# Altium PCB main.PcbDoc (part 1 of 2)
Units mm, origin at the board's own origin, x right, y up, seen from the top; angles counter-clockwise.
Board outline 75 x 37 mm, 2 copper layers (Top Layer, Bottom Layer); 95 components, 71 nets, 284 pads, 114 vias.
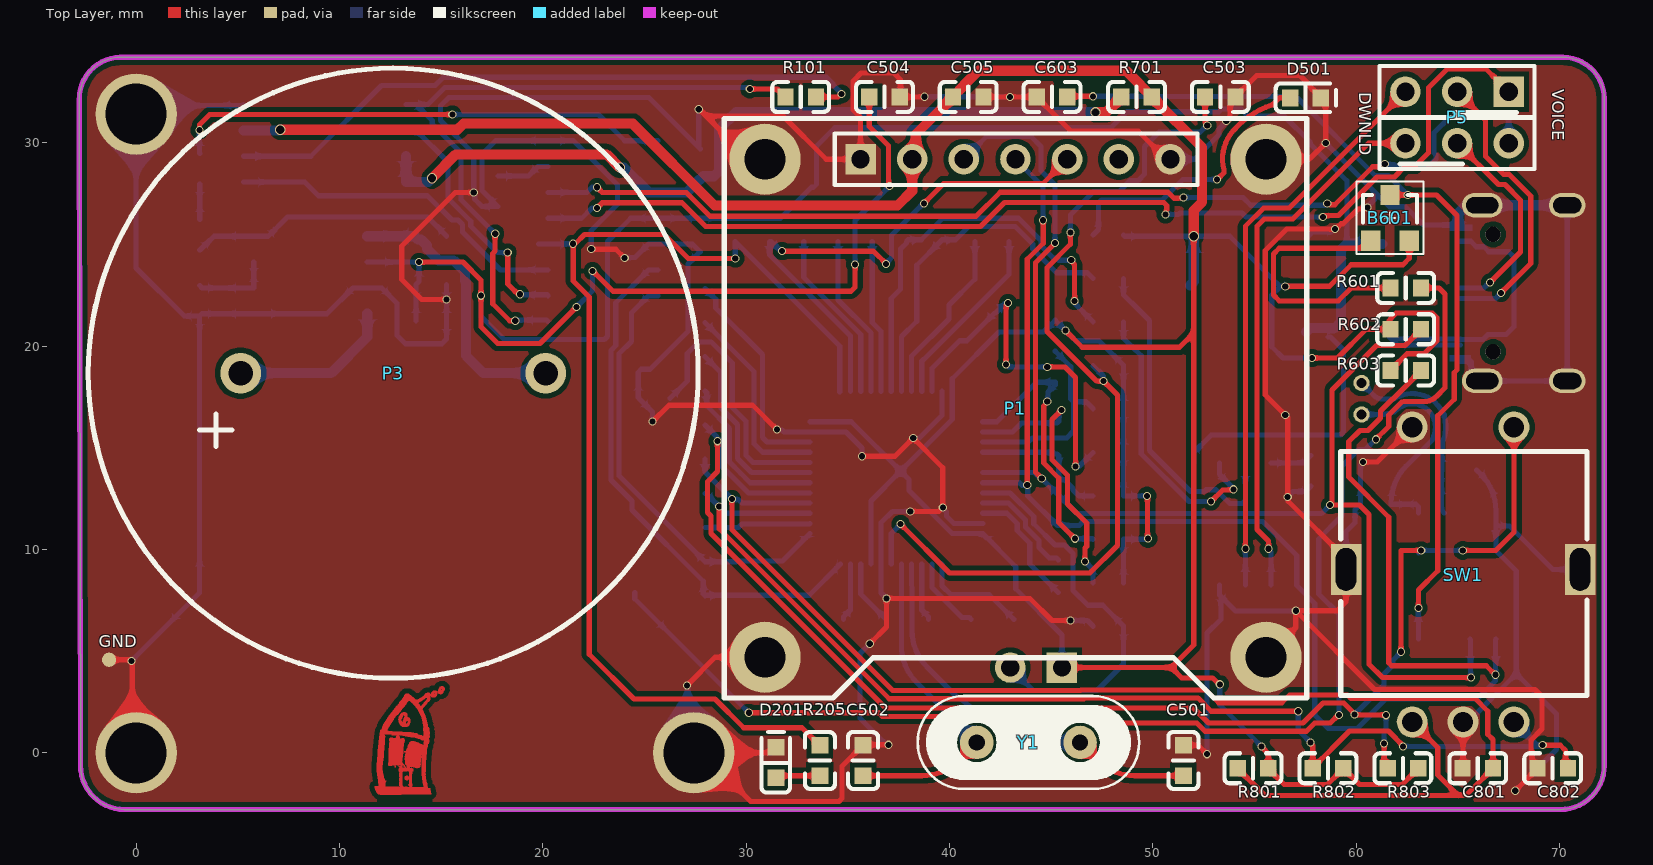
[diagram p0: Top Layer view]
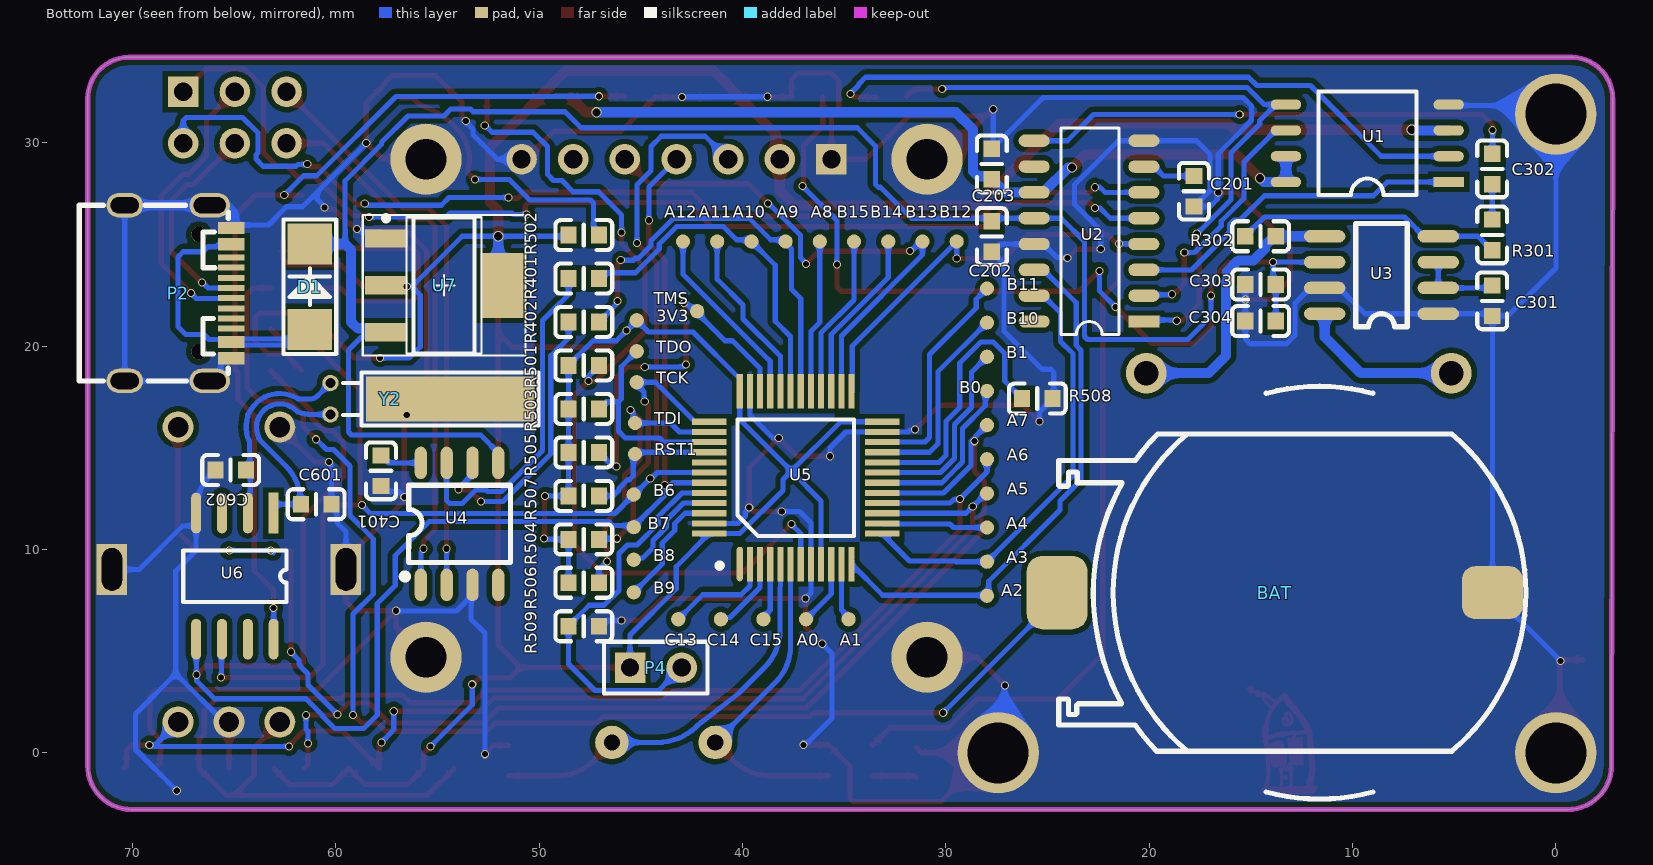
[diagram p1: Bottom Layer view, seen from below]
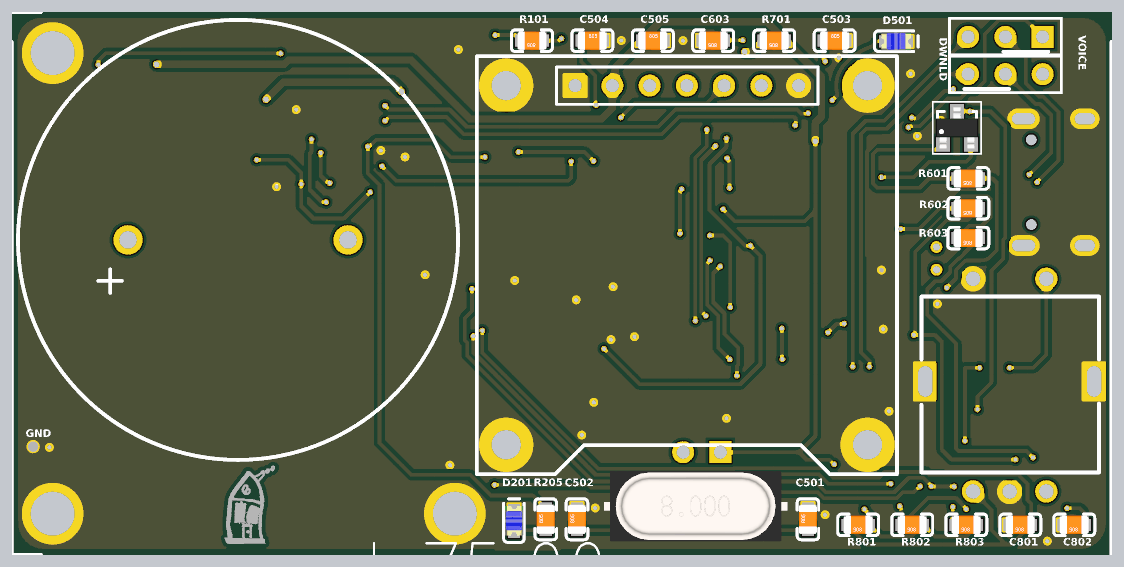
[diagram p3: 3D render of the assembled board from above, using the file's embedded part models]
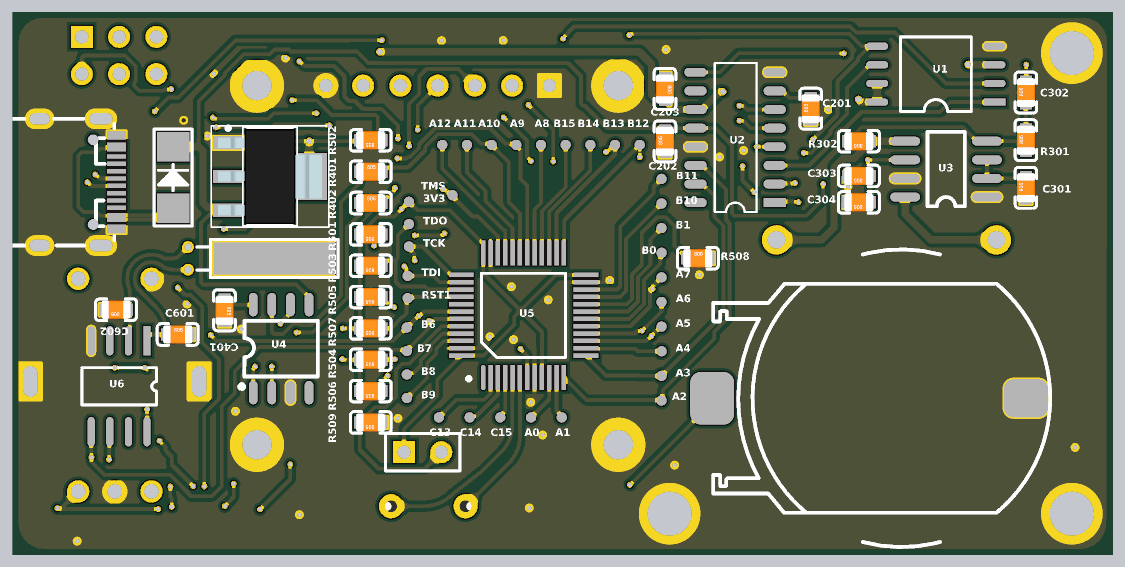
[diagram p4: 3D render of the assembled board from below, using the file's embedded part models]

## Layer stack, top to bottom
Top Solder: solder mask 0.0102, Solder Resist, Dk 3.5
Top Layer: signal copper 0.0356
Dielectric 1: dielectric 0.32, FR-4, Dk 4.8
Bottom Layer: signal copper 0.0356
Bottom Solder: solder mask 0.0102, Solder Resist, Dk 3.5

## Board outline
-2.734,-0.635 ccw(c-0.575,-0.635) -0.575,-2.794 -0.569,-2.794 70.043,-2.794 ccw(c70.043,-0.635) 72.202,-0.635 72.202,32.169 ccw(c70.17,32.169) 70.17,34.201 -0.8,34.201 -0.762,34.201 ccw(c-0.762,32.169) -2.794,32.169

## Design rules (kind name [scope] priority, off if disabled: settings)
Clearance [All] p1: gap=0.254 ignorepadtopadclearanceinfootprint=FALSE except(0: Arc-Hole Track-Hole SMDPad-Hole THPad-Hole Via-Hole Fill-Hole Poly-Hole Region-Hole Text-Hole; 0.152: Arc-Arc Arc-Track Track-Track)
DiffPairsRouting [All] p1: maxlimit=0.254 minlimit=0.254 mostfreqgap=0.254 toplayer_minwidth=0.254 toplayer_maxwidth=0.381 toplayer_prefwidth=0.381 bottomlayer_minwidth=0.254 bottomlayer_maxwidth=0.381 bottomlayer_prefwidth=0.381 maxuncoupledlength=12.7
HoleSize [All] p1: absolutevalues=TRUE maxlimit=3 minlimit=0.3 maxpercent=80.000 minpercent=20.000
MinimumSolderMaskSliver [All] p1: minsoldermaskwidth=0.152
PolygonConnect [All] p1: connectstyle=Direct reliefconductorwidth=0.254 reliefentries=4 polygonreliefangle="90 Angle" airgapwidth=0.254
RoutingVias [All] p1: holewidth=0.3 width=0.5 viastyle="Through Hole" minholewidth=0.3 minwidth=0.4 maxholewidth=1 maxwidth=1.27
SilkToSilkClearance [All] p1: silktosilkclearance=0.054
SilkToSolderMaskClearance [IsPad] p1: minsilkscreentomaskgap=0.152 clearancetoexposedcopper=TRUE
SolderMaskExpansion [All] p1: expansion=0.102 istentingtop=FALSE
Width VCC3V3 [All] p1: maxlimit=1 minlimit=0.16 preferedwidth=0.254
Width [All] p2: maxlimit=0.254 minlimit=0.254 preferedwidth=0.254
25 further rules are at their usual default settings.

## Classes and differential pairs
differential pair USB: +USB_P -USB_N

## Components (designator, comment, footprint, x,y, rotation, side; value= is the part's Value field where it differs from the comment)
3V3 "Socket" TP#1 45.201,21.269 r0 top
A0 "Socket" TP#1 36.877,6.566 r180 top
A1 "Socket" TP#1 34.784,6.566 r180 top
A2 "Socket" TP#1 27.976,7.719 r0 top
A3 "Socket" TP#1 27.976,9.398 r90 top
A4 "Socket" TP#1 27.976,11.077 r90 top
A5 "Socket" TP#1 27.976,12.757 r90 top
A6 "Socket" TP#1 27.976,14.436 r90 top
A7 "Socket" TP#1 27.976,16.115 r90 top
A8 "Socket" TP#1 36.197,25.146 r180 top
A9 "Socket" TP#1 37.88,25.146 r180 top
A10 "Socket" TP#1 39.563,25.146 r270 top
A11 "Socket" TP#1 41.246,25.146 r270 top
A12 "Socket" TP#1 42.928,25.146 r270 top
B0 "Socket" TP#1 27.976,17.794 r90 top
B1 "Socket" TP#1 27.976,19.474 r90 top
B6 "Socket" TP#1 45.347,12.699 r90 top
B7 "Socket" TP#1 45.347,11.096 r0 top
B8 "Socket" TP#1 45.347,9.492 r90 top
B9 "Socket" TP#1 45.347,7.889 r90 top
B10 "Socket" TP#1 27.976,21.153 r180 top
B11 "Socket" TP#1 27.976,22.832 r180 top
B12 "Socket" TP#1 29.466,25.146 r270 top
B13 "Socket" TP#1 31.149,25.146 r270 top
B14 "Socket" TP#1 32.832,25.146 r270 top
B15 "Socket" TP#1 34.515,25.146 r270 top
B601 "BAS70-05" SMT_TRIODE_NPN 61.661,26.307 r0 top
BAT "3.6V CR2032-8" CR2032-8 11.623,7.874 r270 bottom locked
C13 "Socket" TP#1 43.157,6.566 r270 top
C14 "Socket" TP#1 41.064,6.566 r270 top
C15 "Socket" TP#1 38.97,6.566 r270 top
C201 "105" 0603_CAP 17.803,27.615 r90 bottom
C202 "105" 0603_CAP 27.74,25.392 r90 bottom
C203 "105" 0603_CAP 27.74,28.959 r270 bottom
C301 "105" 0603_CAP 3.131,22.225 r90 bottom
C302 "105" 0603_CAP 3.131,28.715 r90 bottom
C303 "104" 0603_CAP 14.52,23.03 r0 bottom
C304 "475" 0603_CAP 14.52,21.231 r0 bottom
C401 "100pF" 0603_CAP 57.78,13.867 r270 bottom
C501 "22pF" 0603_CAP 51.501,-0.381 r90 top
C502 "22pF" 0603_CAP 35.753,-0.381 r90 top
C503 "104" 0603_CAP 53.318,32.258 r0 top
C504 "10uF" 0603_CAP 36.801,32.258 r0 top
C505 "10uF" 0603_CAP 40.921,32.258 r0 top
C601 "15pF" 0603_CAP 60.966,12.221 r180 bottom
C602 "15pF" 0603_CAP 65.172,13.909 r0 bottom
C603 "104" 0603_CAP 45.04,32.258 r180 top
C801 "104" 0603_CAP 65.979,-0.762 r180 top
C802 "104" 0603_CAP 69.662,-0.762 r180 top
D1 "1N5819/SS14" SMA 61.28,20.819 r90 bottom
D201 "LED-r" LED-0603 31.468,-0.483 r90 top
D501 "LED-r" LED-0603 57.514,32.207 r0 top
GND "Socket" TP#2 -1.331,4.572 r90 top
P1 "I2C screen" Screen 28.925,31.189 r0 top locked
P2 "TypeC-16P" "type-c 16pin" 67.757,22.606 r270 bottom locked
P3 "SPEAKER" Speaker 12.639,18.669 r0 top locked
P4 "NC" HDR1X2 45.532,4.191 r180 bottom
P5 "NC 3X2" HDR2X3 67.503,32.512 r180 top locked
R101 "100" 0603_CAP 32.682,32.258 r180 top
R205 "330" 0603_CAP 33.623,-0.381 r90 top
R301 "20K" 0603_CAP 3.131,25.47 r90 bottom
R302 "47K" 0603_CAP 14.52,25.4 r0 bottom
R401 "0" 0603_CAP 47.805,23.322 r180 bottom
R402 "0" 0603_CAP 47.805,21.184 r180 bottom
R501 "10K" 0603_CAP 47.805,19.047 r0 bottom
R502 "220" 0603_CAP 47.805,25.459 r0 bottom
R503 "10K" 0603_CAP 47.805,16.91 r0 bottom
R504 "10K" 0603_CAP 47.805,10.498 r0 bottom
R505 "10K" 0603_CAP 47.805,14.772 r0 bottom
R506 "10K" 0603_CAP 47.805,8.36 r0 bottom
R507 "10K" 0603_CAP 47.805,12.635 r0 bottom
R508 "100K" 0603_CAP 25.503,17.416 r180 bottom
R509 "10K" 0603_CAP 47.805,6.223 r0 bottom
R601 "1K" 0603_CAP 62.435,22.86 r180 top
R602 "4.7K" 0603_CAP 62.435,20.828 r180 top
R603 "4.7K" 0603_CAP 62.435,18.796 r180 top
R701 "0 NC" 0603_CAP 49.199,32.258 r180 top
R801 "10K" 0603_CAP 54.93,-0.762 r180 top
R802 "10K" 0603_CAP 58.613,-0.762 r180 top
R803 "10K" 0603_CAP 62.296,-0.762 r180 top
RST1 "Socket" TP#1 45.288,14.693 r90 top
SW1 "EC11" EC11 65.257,1.517 r0 top locked
TCK "Socket" TP#1 45.201,18.221 r90 top
TDI "Socket" TP#1 45.288,16.217 r90 top
TDO "Socket" TP#1 45.201,19.745 r90 top
TMS "Socket" TP#1 42.23,21.717 r180 top
U1 "W25Q32" SOP8-208mil 5.273,28.067 r0 bottom
U2 "JQ8400-FL" JQF8400-FL 20.259,21.209 r0 bottom locked
U3 "8002A" 8002A 5.781,21.59 r0 bottom
U4 "CH340N" SOP8 55.819,8.255 r180 bottom locked
U5 "STM32F103C8T6" LQFP48 40.134,9.28 r180 bottom locked
U6 "PCF8563T/5" PCF8563 63.058,11.788 r270 bottom locked
U7 "AMS1117-3.3" SOT-223 54.676,22.987 r0 bottom locked
Y1 "8MHz" CPU-crystal 41.341,0.508 r0 top locked
Y2 "32.768K" Crystal 60.264,16.637 r90 bottom locked

## Footprints (in the part's own frame and the unit in brackets; to place one, negate y for a bottom-side part, rotate by r counter-clockwise, add the part's x,y. Pads: shape width x height; smd on the part's side, far side on the other; paste and mask are expansions set on the pad)
0603_CAP [mm]
  rect 0.8x0.83 smd: 1(-0.75,0) 2(0.75,0)
  silkscreen extent -1.4,-0.74 1.4,0.74, body extent -1,-0.62 1,0.63, height 0.78
8002A [mil]
  oval 80x24 smd: 1(0,0) 2(0,-50) 3(0,-100) 4(0,-150) 5(220,-150) 6(220,-100) 7(220,-50) 8(220,0)
  silkscreen extent 60,-175 160,25
CPU-crystal [mil] "8MHz"
  round 65 hole 31.5: 1(0,0) 2(200,0)
  silkscreen extent -114,-90 314,90, body extent -148,-94 344,94, height 157
CR2032-8 [mm] "东莞市科宇塑胶五金有限公司"
  rrect50% 3.6x3 smd: 1(0,-12.9)
  rrect50% 2.6x3 smd: 2(0,8.5)
  silkscreen extent -10.15,-12.83 10.15,10.15
Crystal [mm] "32.768KHz"
  round 0.8 hole 0.5: 1(0,0) 2(1.549,0)
  rect 2.2x8.3 smd: 3(0.762,-5.893)
  silkscreen extent -0.54,-10.24 2.06,-0.61
EC11 [mm]
  round 1.524 hole 1: 1(-2.5,0) 2(0,0) 3(2.5,0) 4(2.5,14.5) 5(-2.5,14.5)
  rect 1.5x2.524 hole 1 slot 2.1 at 90 deg: 6(5.755,7.5) 7(-5.755,7.5)
  silkscreen extent -6.02,1.3 6.09,13.3
HDR1X2 [mm] "Connector; Header; 2 Position"
  rect 1.5x1.5 hole 0.9: 1(0,0)
  round 1.5 hole 0.9: 2(2.54,0)
  silkscreen extent -1.27,-1.27 3.81,1.27
HDR2X3 [mm] "Connector; Header; 3x2 Position"
  rect 1.5x1.5 hole 0.9: 1(0,0)
  round 1.5 hole 0.9: 2(0,2.54) 3(2.54,0) 4(2.54,2.54) 5(5.08,0) 6(5.08,2.54)
  silkscreen extent -1.27,-1.27 6.35,3.81
JQF8400-FL [mil]
  rect 60x24 smd: 1(0,0)
  oval 60x24 smd: 2(0,-50) 3(0,-100) 4(0,-150) 5(0,-200) 6(0,-250) 7(0,-300) 8(0,-350) 9(212.6,-350) 10(212.6,-300) 11(212.6,-250) 12(212.6,-200) 13(212.6,-150) 14(212.6,-100) 15(212.6,-50) 16(212.6,0)
  silkscreen extent 49,-375 161,25
LED-0603 [mm]
  rect 0.821x0.83 smd: 1(-0.75,0) 2(0.75,0)
  silkscreen extent -1.47,-0.69 1.5,0.71, body extent -1.01,-0.62 1.01,0.63, height 1.1
LQFP48 [mm]
  oval 0.3x1.7 smd: 1(0,0)
  rect 0.3x1.7 smd: 2(0.5,0) 3(1,0) 4(1.5,0) 5(2,0) 6(2.5,0) 7(3,0) 8(3.5,0) 9(4,0) 10(4.5,0) 11(5,0) 12(5.5,0) 25(5.5,8.5) 26(5,8.5) 27(4.5,8.5) 28(4,8.5) 29(3.5,8.5) 30(3,8.5) 31(2.5,8.5) 32(2,8.5) 33(1.5,8.5) 34(1,8.5) 35(0.5,8.5) 36(0,8.5)
  rect 1.7x0.3 smd: 13(7,1.5) 14(7,2) 15(7,2.5) 16(7,3) 17(7,3.5) 18(7,4) 19(7,4.5) 20(7,5) 21(7,5.5) 22(7,6) 23(7,6.5) 24(7,7) 37(-1.5,7) 38(-1.5,6.5) 39(-1.5,6) 40(-1.5,5.5) 41(-1.5,5) 42(-1.5,4.5) 43(-1.5,4) 44(-1.5,3.5) 45(-1.5,3) 46(-1.5,2.5) 47(-1.5,2) 48(-1.5,1.5)
  silkscreen extent -1.12,-0.2 5.61,7.11
PCF8563 [mm]
  rect 2x0.49 smd: 1(0,0)
  oval 2x0.49 smd: 2(0,-1.27) 3(0,-2.54) 4(0,-3.81) 5(6.2,-3.81) 6(6.2,-2.54) 7(6.2,-1.27) 8(6.2,0)
  silkscreen extent 1.84,-4.45 4.37,0.63
Screen [mm] "0.96 inch"
  rect 1.5x1.5 hole 0.9: 1(6.7,-2)
  round 1.5 hole 0.9: 2(9.24,-2) 3(11.78,-2) 4(14.32,-2) 5(16.86,-2) 6(19.4,-2) 7(21.94,-2)
  round 3.5 hole 2: ""(2,-26.49) ""(2,-2) ""(26.64,-26.49) ""(26.64,-2)
  silkscreen extent 0,-28.49 28.64,0
SMA [mm]
  rect 2x2.2 smd: 1(0,0) 2(4.2,0)
  silkscreen extent -1.2,-1.3 5.4,1.3
SMT_TRIODE_NPN [mm] "Surface mount NPN transistor, package SOT-23"
  rect 0.95x1 smd: 1(-0.95,-1.125) 2(0.95,-1.125) 3(0,1.125)
  silkscreen extent -1.65,-1.78 1.65,1.78, body extent -1.45,-1.4 1.45,1.4, height 1.3
SOP8 [mm] "CH340N"
  oval 0.6x1.598 smd: 1(0,0) 2(1.27,0) 3(2.54,0) 4(3.81,0) 5(3.81,6) 6(2.54,6) 7(1.27,6) 8(0,6)
  silkscreen extent -0.94,0.26 4.4,4.9
SOP8-208mil [mm]
  rect 1.5x0.5 smd: 1(0,0)
  oval 1.5x0.5 smd: 2(0,-1.27) 3(0,-2.54) 4(0,-3.81) 5(8,-3.81) 6(8,-2.54) 7(8,-1.27) 8(8,0)
  silkscreen extent 1.58,-4.44 6.4,0.64
SOT-223 [mm] "3 LEAD SOT-223 PLASTIC PACKAGE"
  rect 2.1x0.9 smd: 1(2.85,-2.3) 2(2.85,0) 3(2.85,2.3)
  rect 2.1x3.2 smd: 2(-2.85,0)
  silkscreen extent -4,-3.45 4,3.45, body extent -3.54,-3.25 3.54,3.25, height 1.65
Speaker [mm]
  round 2 hole 1.2: 1(-7.5,0) 2(7.5,0)
  silkscreen extent -15,-15 15,15
TP#1 [mm]
  round 0.7 smd far side: 1(0,0)
TP#2 [mm]
  round 0.7 smd: 1(0,0)
"type-c 16pin" [mm] "https://detail.1688.com/offer/564875961516.html?spm=a26352.13672862.offerlist.11.52bd1e62PUNFDG"
  rect 0.3x1.3 smd: A1(-3.35,2.623) A4(-2.55,2.623) A5(-1.25,2.623) A6(-0.25,2.623) A7(0.25,2.623) A8(1.25,2.624) A9(2.55,2.623) A12(3.35,2.623) B1(3.05,2.623) B4(2.25,2.623) B5(1.75,2.623) B6(0.75,2.623) B7(-0.75,2.623) B8(-1.75,2.624) B9(-2.25,2.623) B12(-3.05,2.623)
  oval 1.2x1.8 hole 0.8 slot 1.4 at 90 deg: S1(-4.32,-2.624) S1(4.32,-2.624)
  oval 1.2x2 hole 0.8 slot 1.6 at 90 deg: S1(-4.32,1.556) S1(4.32,1.556)
  round 0.75 hole 0.75 unplated: ""(-2.89,1.026) ""(2.89,1.026)
  silkscreen extent -4.32,-4.86 4.32,2.47

## Part data
B601: library part "BAS70 74", "贴片三极管  丝印75"
BAT: library part Battery, "电池座 半圆形", LatestRevisionDate=17-Jul-2002, LatestRevisionNote="Re-released for DXP Platform.", PackageReference=BAT-2, Published=24-Mar-1999, Publisher="Altium Limited"
C201 C202 C203 C301 C302 C303 C304 C401 C501 C502 C503 C504 C505 C601 C602 C603 C801 C802: library part Cap, "Capacitor 0603", LatestRevisionDate=17-Jul-2002, LatestRevisionNote="Re-released for DXP Platform.", PackageReference=RAD-0.3, Published=8-Jun-2000, Publisher="Altium Limited"
  C201 C202 C203 C301 C302 C303 C304 C401: PackageDescription="Radial Cap, Thru-Hole; 2 Leads; 0.3 in Pin Spacing"
D1: library part SMT_DIODE_SCHOTTKY_SOD_323, "肖特基整流二极管SOD-323"
D201 D501: library part LED2, "NC", LatestRevisionDate=17-Jul-2002, LatestRevisionNote="Re-released for DXP Platform.", PackageReference=3.2X1.6X1.1, PackageVersion=Feb-2002, Published=8-Jun-2000, Publisher="Altium Limited"
P1: library part "Header 7", "单排 2.54母座7P", LatestRevisionDate=17-Jul-2002, LatestRevisionNote="Re-released for DXP Platform.", Publisher="Altium Limited"
P2: "TypeC接口16P"
P3: library part "Header 2", "扬声器", LatestRevisionDate=17-Jul-2002, LatestRevisionNote="Re-released for DXP Platform.", Publisher="Altium Limited"
P4: library part "Header 2", "下载短接口", LatestRevisionDate=17-Jul-2002, LatestRevisionNote="Re-released for DXP Platform.", Publisher="Altium Limited"
P5: library part "Header 3X2", "USB跳线接口", LatestRevisionDate=17-Jul-2002, LatestRevisionNote="Re-released for DXP Platform.", Publisher="Altium Limited"
R101 R205 R301 R302 R401 R402 R501 R502 R503 R504 R505 R506 R507 R508 R509 R601 R602 R603 R701 R801 R802 R803: library part Res2, "Resistor 0603", LatestRevisionDate=17-Jul-2002, LatestRevisionNote="Re-released for DXP Platform.", PackageReference=AXIAL-0.4, Published=8-Jun-2000, Publisher="Altium Limited"
  R101 R205 R301 R302 R401 R402 R801 R802 R803: PackageDescription="Axial Device, Thru-Hole; 2 Leads; 0.4 in Pin Spacing"
SW1: "旋转编码器20脉冲"
U1: "Flash"
U2: "语音芯片"
U3: "3W功放"
U4: library part ch340, "U转串"
U5: library part STM32F101CB, "单片机"
U6: library part PCF8563, "时钟芯片"
U7: library part NCP1117
Y1: library part XTAL, "49S型直插无源晶振", LatestRevisionDate=17-Jul-2002, LatestRevisionNote="Re-released for DXP Platform.", PackageReference=R38, Published=8-Jun-2000, Publisher="Altium Limited"
Y2: library part XTAL, "圆柱型3*8mm无源晶振", LatestRevisionDate=17-Jul-2002, LatestRevisionNote="Re-released for DXP Platform.", PackageReference=R38, Published=8-Jun-2000, Publisher="Altium Limited"
3V3 A0 A1 A2 A3 A4 A5 A6 A7 A8 A9 A10 A11 A12 B0 B1 B6 B7 B8 B9 B10 B11 B12 B13 B14 B15 C13 C14 C15 GND RST1 TCK TDI TDO TMS: LatestRevisionDate=17-Jul-2002, LatestRevisionNote="Re-released for DXP Platform.", Publisher="Altium Limited"

## Free pads (board coordinates)
  round 4 hole 3: ""(0,0) ""(0,31.407) ""(27.426,0)

## Via types
v1: diameter 0.4, hole 0.3, Top Layer to Bottom Layer, 109 vias
v2: diameter 0.5, hole 0.4, Top Layer to Bottom Layer, 5 vias

## Nets (pads, with @x,y where several pads share a name; then routed paths per layer and width w, separated by ;. In a path a pad name is that pad's centre, name@x,y a point inside that pad or via, vN(x,y) a via of type N, cw(c..) or ccw(c..) an arc to the next point about the centre after c; other vN are vias at no path point)
3.3V: C203.2 R701.2 U1.7 U1.8 U2.11 | length 41
  Top Layer w0.5: v2(14.548,28.252) 15.724,29.428 23.137,29.428 v2(23.788,28.777) ; v2(47.183,31.496) 47.702,31.496 48.449,32.243 R701.2@48.449,32.258
  Bottom Layer w0.5: U1.7@13.273,29.337 U1.8@13.273,28.067 14.363,28.067 v2(14.548,28.252) ; v2(23.788,28.777) 23.984,28.777 25.202,27.559 27.09,27.559 27.574,28.044 27.574,28.059 27.725,28.209 C203.2@27.74,28.209 27.882,28.351 28.417,28.351 28.667,28.601 28.667,30.658 29.505,31.496 v2(47.183,31.496)
BUSY: B12.1 R205.2 U2.4 U5.25 | length 54.4
  Top Layer w0.254: v1(29.465,24.311) 27.154,24.311 25.973,25.492 22.05,25.492 21.59,25.032 v1(21.493,25.032) 21.493,23.204 22.284,22.413 22.284,4.843 24.477,2.649 28.467,2.649 29.882,1.235 32.743,1.235 33.608,0.369 R205.2@33.623,0.369
  Bottom Layer w0.254: U2.4@19.802,25.019 U2.4@20.259,25.019 20.265,25.025 21.487,25.025 v1(21.493,25.032) ; v1@29.466,24.312 B12.1@29.466,25.146 ; B12.1@29.466,25.146 30.474,24.139 34.603,20.01 U5.25@34.603,17.749
CS: A4.1 U5.14 | length 5.2
  Bottom Layer w0.254: A4.1@27.976,11.077 29.623,11.077 29.794,11.249 33.103,11.249 U5.14@33.134,11.28
DACL: C302.2 U2.9 | length 24.7
  Top Layer w0.254: v1(3.11,30.618) 3.124,30.632 3.124,30.891 3.621,31.388 v1(15.549,31.388)
  Bottom Layer w0.254: v1(3.11,30.618) 3.11,29.486 C302.2@3.131,29.465 ; v1(15.549,31.388) 22.738,31.388 24.027,30.099 U2.9@25.659,30.099
DACR: U2.10
EC11_A: A6.1 C801.1 R801.2 SW1.1 U5.16 | length 70.3
  Top Layer w0.254: v1(29.297,12.481) 29.297,10.97 37.207,3.06 46.44,3.06 46.475,3.095 52.6,3.095 53.238,2.457 56.337,2.457 56.728,2.849 59.558,2.849 59.74,2.667 65.851,2.667 66.474,2.044 66.474,0.913 66.729,0.657 C801.1@66.729,-0.762 ; R801.2@54.18,-0.762 54.18,-0.777 55.51,-2.107 65.018,-2.107 ; SW1.1@62.757,1.517 64.009,0.265 64.009,-1.098 65.018,-2.107 ; C801.1@66.729,-0.777 66.456,-1.05 66.441,-1.05 65.384,-2.107 65.018,-2.107
  Bottom Layer w0.254: A6.1@27.976,14.436 27.976,13.802 v1(29.297,12.481) 29.325,12.453 29.615,12.453 29.789,12.28 U5.16@33.134,12.28
EC11_B: A5.1 C802.1 R802.2 SW1.3 U5.15 | length 58.3
  Top Layer w0.254: v1(28.674,12.11) 28.674,11.019 37.039,2.654 46.608,2.654 46.643,2.688 52.229,2.688 52.874,2.043 v1(57.151,2.043) ; v1(57.756,0.509) 57.756,0.47 57.863,0.363 R802.2@57.863,-0.747 ; R802.2@57.863,-0.762 R802.2@57.863,-0.747 ; v1(62.295,0.315) 62.295,0.355 61.957,0.693 61.957,0.701 61.594,1.064 59.674,1.064 R802.2@57.863,-0.747 ; v1(69.172,0.374) 70.034,0.374 70.297,0.111 70.297,-0.647 C802.1@70.412,-0.762
  Bottom Layer w0.254: A5.1@27.976,12.757 28.032,12.757 29.009,11.78 U5.15@33.134,11.78 ; v1(57.151,2.043) 57.151,1.154 57.275,1.03 57.275,0.99 v1(57.756,0.509) ; v1(62.295,0.315) v1@69.01,0.315 ; SW1.3@67.757,1.517 68.872,0.402 69.144,0.402 v1(69.172,0.374)
EC11_Key: A7.1 R803.2 SW1.4 U5.17 | length 72.9
  Top Layer w0.254: v1(28.593,15.323) 28.593,13.827 28.093,13.326 28.093,11.816 28.268,11.641 28.268,10.78 36.85,2.198 52.002,2.198 52.738,1.462 57.391,1.462 58.371,2.442 59.39,2.442 59.73,2.102 59.73,2.1 59.914,1.916 v1(59.914,1.877) 59.929,1.862 61.455,1.862 v1(61.469,1.848) ; v1(61.376,0.46) 61.376,-0.592 R803.2@61.546,-0.762 ; v1(62.204,4.97) 62.204,9.935 62.222,9.953 v1(63.197,9.953) ; v1(65.242,9.954) v1(65.242,9.954) 66.868,9.953 67.757,10.842 SW1.4@67.757,16.017
  Bottom Layer w0.254: A7.1@27.976,16.115 28.565,15.526 28.565,15.351 v1(28.593,15.323) ; v1@28.681,15.41 28.768,15.323 28.768,14.13 30.118,12.78 U5.17@33.134,12.78 ; v1(59.914,1.877) 61.373,3.335 61.373,3.88 61.732,4.239 61.732,4.297 61.804,4.369 61.804,4.548 62.204,4.948 v1(62.204,4.97) ; v1(61.376,0.46) 61.376,1.075 61.469,1.168 v1(61.469,1.848) ; v1@63.072,9.828 v1(63.197,9.953) v1(63.197,9.953) v1(65.242,9.954)
GND: BAT.2 C201.1 C202.1 C203.1 C301.1 C303.2 C304.2 C401.2 C501.2 C502.2 C503.2 C504.2 C505.2 C601.2 C602.2 C603.2 C801.2 C802.2 D201.2 D501.2 GND.1 P1. P1.1 P1.7 P2.A1 P2.A12 P2.B1 P2.B12 P2.S1 pad. R508.2 R509.1 SW1.2 SW1.5 SW1.6 SW1.7 U1.4 U2.8 U2.13 U3.1 U3.7 U4.3 U5.8 U5.23 U5.35 U5.47 U6.4 U7.1 Y2.3 | length 381.9
  Top Layer w0.254: GND.1@-1.331,4.572 -0.312,4.572 -0.262,4.522 v1(-0.222,4.522) -0.194,4.494 -0.194,0.194 pad.@0,0 ; v1(15.27,22.293) 14.046,22.293 13.064,23.275 13.064,24.925 15.691,27.552 v1(16.604,27.552) ; v1(22.381,24.766) 23.585,24.766 v1(24.026,24.325) ; v1(25.398,16.289) 26.203,17.094 30.319,17.094 v1(31.509,15.904) ; v1(27.085,3.311) 28.473,4.699 P1.@30.925,4.699 ; pad.@27.426,0 pad.@27.838,0 ; v1(27.666,31.647) 27.706,31.647 28.032,31.32 ; P1.@30.925,29.189 30.163,29.189 28.032,31.32 ; D201.2@31.468,0.267 31.201,0 pad.@27.838,0 ; v1(35.702,14.581) 37.319,14.581 v1(38.215,15.477) 39.671,14.021 v1(39.671,12.068) 39.475,11.872 v1(38.071,11.872) ; v1(36.08,5.362) 36.899,6.181 v1(36.899,7.595) 43.948,7.595 45.04,6.503 v1(45.95,6.503) ; v1(36.997,0.392) 35.776,0.392 C502.2@35.753,0.369 35.738,0.369 34.708,-0.661 34.708,-2.241 34.559,-2.39 30.228,-2.39 pad.@27.838,0 ; v1(38.775,32.263) 38.77,32.258 C504.2@37.551,32.258 37.591,32.298 37.591,33.1 37.266,33.425 35.653,33.425 35.27,33.042 35.27,31.605 35.625,31.25 P1.1@35.625,29.19 33.938,29.19 31.808,31.32 28.032,31.32 ; C505.2@41.671,32.258 v1(42.98,32.258) C603.2@44.29,32.258 44.29,32.243 45.971,30.562 49.282,30.562 50.654,29.19 P1.7@50.865,29.19 ; C501.2@51.501,0.369 52.231,0.369 v1(52.67,-0.07) ; v1(53.609,31.072) 53.613,31.112 53.673,31.172 53.795,31.294 53.795,32 55.108,33.313 57.234,33.313 57.614,32.933 57.614,32.861 58.264,32.212 D501.2@58.264,32.207 58.501,31.97 v1(58.501,29.995) 57.736,29.23 55.605,29.23 P1.@55.565,29.189 ; P1.@55.565,4.699 57.031,6.165 v1(57.031,6.986) ; v1(60.328,14.301) 61.041,14.301 SW1.5@62.757,16.017 ; v1(60.559,26.824) 60.475,26.74 60.083,26.74 59.359,26.016 59.262,26.016 58.999,25.753 v1(58.96,25.753) 56.584,25.753 55.527,24.696 55.527,17.597 v1(56.513,16.611) 56.632,16.492 v1(56.632,12.586) 56.66,12.558 56.66,12.371 59.502,9.529 59.502,7.427 59.061,6.986 v1(57.031,6.986) ; C801.2@65.229,-0.762 65.257,-0.734 SW1.2@65.257,1.517 ; v1(67.825,-1.87) 67.825,-1.864 68.912,-0.777 C802.2@68.912,-0.762 68.639,-0.489 68.639,0.046 68.591,0.094 68.591,0.615 69.141,1.165 69.141,2.765 68.791,3.115 60.902,3.115 v1(57.031,6.986)
  Bottom Layer w0.254: v1(-0.222,4.522) 3.123,7.867 BAT.2@3.123,7.874 3.123,21.467 C301.1@3.131,21.475 ; U1.4@5.273,31.877 5.226,31.83 0.423,31.83 pad.@0,31.407 0,23.844 2.369,21.475 C301.1@3.131,21.475 ; C303.2@15.27,23.03 v1(15.27,22.293) C304.2@15.27,21.231 15.27,20.343 15.045,20.118 13.246,20.118 12.83,20.534 12.83,22.11 12.08,22.86 U3.7@11.369,22.86 10.658,22.86 9.388,21.59 U3.1@5.781,21.59 3.246,21.59 C301.1@3.131,21.475 ; C201.1@17.803,26.865 C201.1@17.788,26.865 ; v1(22.381,24.766) 22.381,25.684 23.669,26.972 23.669,27.937 21.507,30.099 U2.8@20.259,30.099 17.676,30.099 17.007,29.43 17.007,27.646 C201.1@17.788,26.865 ; v1(24.026,24.325) 24.054,24.353 24.536,24.353 25.202,25.019 U2.13@25.659,25.019 27.348,25.019 C202.1@27.725,24.642 ; v1(25.398,16.289) 25.398,16.756 24.753,17.401 R508.2@24.753,17.416 24.691,17.478 24.691,18.709 24.84,18.858 25.272,18.858 27.141,20.727 27.141,24.044 27.451,24.354 27.451,24.369 C202.1@27.725,24.642 ; v1(27.085,3.311) 27.113,3.283 27.113,0.313 pad.@27.426,0 ; v1(27.666,31.647) C203.1@27.666,29.768 ; C202.1@27.74,24.642 C202.1@27.725,24.642 ; C203.1@27.74,29.709 27.725,29.709 C203.1@27.666,29.768 ; v1(31.509,15.904) 31.537,15.876 31.764,15.876 31.86,15.78 U5.23@33.134,15.78 34.909,15.78 35.702,14.987 v1(35.702,14.581) ; v1(36.08,5.362) 35.597,4.879 35.597,1.701 36.906,0.392 v1(36.997,0.392) ; v1(36.899,7.595) 36.634,7.86 U5.8@36.634,9.28 36.634,11.313 37.193,11.872 v1(38.071,11.872) ; v1(38.215,15.477) 38.509,15.477 39.634,16.602 U5.35@39.634,17.78 ; v1(38.775,32.263) 38.778,32.26 42.978,32.26 v1(42.98,32.258) ; v1(39.671,12.068) 39.671,12.028 39.856,11.844 39.856,11.637 40.212,11.28 U5.47@41.634,11.28 ; v1(45.95,6.503) 46.782,6.503 47.055,6.23 R509.1@47.055,6.223 ; P1.7@50.865,29.19 52.054,29.19 53.258,30.394 53.258,30.682 53.609,31.033 v1(53.609,31.072) ; v1(52.67,-0.07) 52.67,5.894 53.345,6.569 U4.3@53.345,7.69 ; U4.3@53.279,8.255 53.279,7.756 U4.3@53.345,7.69 ; v1(56.632,12.586) 56.89,12.844 57.507,12.844 C401.2@57.78,13.117 ; v1@57.045,7 v1(57.031,6.986) 57.017,6.972 54.063,6.972 U4.3@53.345,7.69 ; U7.1@57.526,25.287 57.849,25.61 58.777,25.61 58.92,25.753 v1(58.96,25.753) ; v1(58.501,29.995) 60.93,27.566 ; SW1.7@59.502,9.017 59.502,10.871 59.943,11.312 59.943,11.948 C601.2@60.216,12.221 60.216,14.15 60.328,14.261 v1(60.328,14.301) ; v1(60.559,26.824) 60.559,26.864 60.93,27.235 60.93,27.566 ; P2.A12@65.134,19.256 65.634,19.256 65.657,19.233 65.657,18.723 66.094,18.286 P2.S1@66.201,18.286 P2.S1@70.381,18.286 P2.S1@70.381,26.926 ; P2.A1@65.134,25.956 65.105,25.956 63.317,25.956 62.422,26.851 61.645,26.851 60.93,27.566 ; SW1.2@65.257,1.517 65.506,1.517 67.874,3.885 ; C602.2@65.922,13.909 66.124,13.707 cw(c64.328,11.911) 66.868,11.911 U6.4@66.868,11.788 U6.4@66.868,11.269 ; v1(67.825,-1.87) 69.855,0.16 69.855,1.904 67.874,3.885 ; SW1.6@71.012,9.017 69.668,9.017 67.525,11.16 66.977,11.16 U6.4@66.868,11.269 ; C201.1@17.788,26.865 17.007,26.865 16.651,27.221 16.651,27.505 v1(16.604,27.552) 16.604,29.455 14.968,31.091 14.968,31.815 15.381,32.228 25.206,32.228 C203.1@27.666,29.768 ; U6.4@66.868,11.269 66.868,9.945 67.874,8.939 67.874,3.885
  Bottom Layer w0.5: P2.A1@65.105,25.956 65.005,26.056 65.005,26.499 65.298,26.792 66.067,26.792 P2.S1@66.201,26.926 P2.S1@70.381,26.926
I2C_SCL: B6.1 P1.3 R602.1 U5.42 U6.6 | length 67.7
  Top Layer w0.254: v1(44.535,13.491) 44.228,13.798 44.228,24.101 45.189,25.061 v1(45.189,25.072) ; v1(58.718,12.18) v1@58.809,12.18 ; R602.1@63.185,20.828 63.185,20.813 62.404,20.032 61.002,20.032 58.809,17.839 v1@58.809,12.18 ; v1(65.655,3.696) 61.294,3.696 60.633,4.357 60.633,11.715 60.168,12.18 v1@58.809,12.18
  Bottom Layer w0.254: P1.3@40.705,29.19 41.836,30.321 44,30.321 44.501,29.82 44.501,28.623 45.189,27.935 v1(45.189,25.072) ; U5.42@41.634,13.78 44.186,13.78 44.475,13.491 v1(44.535,13.491) 45.327,12.699 B6.1@45.347,12.699 46.272,11.774 58.302,11.774 58.708,12.18 v1(58.718,12.18) ; U6.6@65.598,5.588 65.627,5.559 65.627,3.724 v1(65.655,3.696)
I2C_SDA: B7.1 P1.4 R603.1 U5.43 U6.5 | length 77.1
  Top Layer w0.254: v1(43.822,13.16) 43.822,24.269 44.608,25.055 44.608,26.185 v1(44.606,26.187) ; R603.1@63.185,18.796 63.185,18.781 62.148,17.744 62.148,17.738 61.809,17.399 61.782,17.399 61.197,16.813 61.197,16.465 60.587,15.856 60.182,15.856 59.633,15.307 59.633,13.555 61.602,11.586 61.602,4.426 61.75,4.277 66.397,4.277 66.838,3.836 v1(66.845,3.836)
  Bottom Layer w0.254: U5.43@41.634,13.28 43.439,13.28 43.559,13.16 v1(43.822,13.16) 43.85,13.132 43.85,12.635 45.31,11.175 46.378,11.175 46.572,11.368 55.407,11.368 57.08,9.695 57.08,8.232 57.965,7.347 57.965,1.852 58.627,1.19 60.049,1.19 60.639,1.78 60.639,1.839 61.459,2.66 65.97,2.66 66.839,3.529 66.839,3.83 66.857,3.847 66.857,5.577 U6.5@66.868,5.588 ; P1.4@43.245,29.19 44.606,27.829 v1(44.606,26.187)
IRQ: B10.1 U5.21 | length 9.9
  Bottom Layer w0.254: B10.1@27.976,21.153 30.394,18.735 30.394,15.19 30.804,14.78 U5.21@33.134,14.78
JNTRST: R507.1 RST1.1 U5.40 | length 6.9
  Bottom Layer w0.254: U5.40@41.634,14.78 45.08,14.78 45.167,14.693 RST1.1@45.288,14.693 45.373,14.608 45.373,13.625 45.568,13.43 45.65,13.43 46.078,13.002 46.078,12.92 46.363,12.635 R507.1@47.055,12.635
JTCK: R504.1 TCK.1 U5.37 | length 13.8
  Top Layer w0.254: v1(44.809,17.276) 44.809,17.236 44.635,17.062 44.635,14.245 45.376,13.503 45.376,11.318 v1(46.167,10.528)
  Bottom Layer w0.254: U5.37@41.634,16.28 42.334,16.28 44.058,18.004 44.06,18.004 44.277,18.221 TCK.1@45.201,18.221 45.201,18.1 44.837,17.737 44.837,17.304 v1(44.809,17.276) ; v1(46.167,10.528) 47.025,10.528 R504.1@47.055,10.498
JTDI: R506.1 TDI.1 U5.38 | length 14.2
  Top Layer w0.254: v1(45.516,16.863) 45.041,16.388 45.041,14.413 45.809,13.645 45.809,12.237 46.748,11.298 46.748,10.156 46.659,10.067 v1(46.659,9.415)
  Bottom Layer w0.254: U5.38@41.634,15.78 43.103,15.78 43.54,16.217 TDI.1@45.288,16.217 45.373,16.302 45.373,16.72 v1(45.516,16.863) ; v1(46.659,9.415) 47.055,9.019 R506.1@47.055,8.36
JTDO: R503.1 TDO.1 U5.39 | length 10.1
  Bottom Layer w0.254: U5.39@41.634,15.28 42.673,15.28 ; 42.673,15.28 43.876,15.28 44.082,15.486 45.77,15.486 46.104,15.82 46.104,17.264 ; TDO.1@45.201,19.745 45.964,18.982 45.964,17.404 46.104,17.264 ; R503.1@47.055,16.91 47.055,16.925 46.782,17.198 46.767,17.198 46.701,17.264 46.104,17.264
JTMS: R505.1 TMS.1 U5.34 | length 18.5
  Top Layer w0.254: v1(42.779,19.103) 42.779,22.022 v1(42.884,22.127) ; v1(44.809,18.977) 45.677,18.977 46.202,18.452 v1(46.202,14.077)
  Bottom Layer w0.254: U5.34@39.134,17.78 39.134,18.909 40.49,20.265 40.863,20.265 42.23,21.632 42.266,21.632 42.733,22.099 42.856,22.099 v1(42.884,22.127) ; v1(42.779,19.103) 42.905,18.977 v1(44.809,18.977) ; v1(46.202,14.077) 46.375,14.077 47.055,14.757 R505.1@47.055,14.772
key: B14.1 U5.27 | length 8.5
  Bottom Layer w0.254: B14.1@32.832,25.146 32.832,23.379 35.634,20.577 35.634,18.788 U5.27@35.634,17.78
NetA0_1: A0.1 U5.10 | length 3.2
  Bottom Layer w0.254: U5.10@35.634,9.28 35.634,7.809 A0.1@36.877,6.566
NetA1_1: A1.1 U5.11 | length 2.9
  Bottom Layer w0.254: A1.1@34.784,6.566 34.784,6.687 35.134,7.037 U5.11@35.134,9.28
NetA8_1: A8.1 U5.29 | length 7.5
  Bottom Layer w0.254: A8.1@36.197,25.146 36.197,21.163 36.634,20.727 U5.29@36.634,17.78
NetA11_1: A11.1 U5.32 | length 8.7
  Bottom Layer w0.254: U5.32@38.134,17.78 38.134,18.819 38.134,19.498 39.975,21.339 39.975,22.02 41.246,23.291 A11.1@41.246,25.146
NetA12_1: A12.1 U5.33 | length 9.2
  Bottom Layer w0.254: U5.33@38.634,17.78 38.634,19.274 38.689,19.33 38.722,19.33 42.928,23.537 A12.1@42.928,25.146
NetB0_1: B0.1 U5.18 | length 8.4
  Bottom Layer w0.254: B0.1@27.976,17.794 28.061,17.709 28.061,17.064 29.174,15.95 29.174,14.298 29.73,13.742 30.193,13.28 U5.18@33.134,13.28
NetB1_1: B1.1 U5.19 | length 9.5
  Bottom Layer w0.254: B1.1@27.976,19.474 28.737,18.713 28.737,16.981 29.581,16.137 29.581,14.467 30.267,13.78 U5.19@33.134,13.78
NetB8_1: B8.1 U5.45 | length 5.3
  Bottom Layer w0.254: U5.45@41.634,12.28 42.902,12.28 43.738,11.444 43.738,11.096 44.396,10.438 44.396,10.087 44.906,9.577 45.262,9.577 B8.1@45.347,9.492
NetB9_1: B9.1 U5.46 | length 6.1
  Bottom Layer w0.254: U5.46@41.634,11.78 42.827,11.78 43.331,11.276 43.331,10.928 43.948,10.311 43.948,9.288 B9.1@45.347,7.889
NetB11_1: B11.1 U5.22 | length 10.9
  Bottom Layer w0.254: B11.1@27.976,22.832 28.506,22.302 28.506,21.875 30.8,19.581 30.8,15.5 31.02,15.28 U5.22@33.134,15.28
NetB15_1: B15.1 U5.28 | length 8
  Bottom Layer w0.254: B15.1@34.515,25.146 34.515,22.271 36.134,20.652 36.134,18.819 U5.28@36.134,17.78
NetB601_1: B601.1 R601.2 | length 13.2
  Top Layer w0.254: B601.1@60.711,25.182 60.711,25.157 60.363,24.809 56.215,24.809 55.933,24.527 55.933,22.507 56.215,22.225 59.121,22.225 59.756,22.86 R601.2@61.685,22.86
NetB601_3: B601.3 C603.1 U6.8 | length 44.1
  Top Layer w0.254: C603.1@45.79,32.258 45.816,32.284 v1(47.056,32.284) ; B601.3@61.661,27.432 v1(62.536,27.432) 63.947,27.432 64.963,26.416 64.963,18.835 64.82,18.692 64.82,17.383 64.01,16.573 64.01,8.953 63.058,8.001 v1(63.058,7.112)
  Bottom Layer w0.254: v1(47.056,32.284) 49.222,32.284 49.234,32.272 57.046,32.272 60.943,28.375 61.593,28.375 v1(62.536,27.432) ; U6.8@63.058,5.588 v1(63.058,7.112)
NetBAT_1: BAT.1 R601.1 | length 64
  Top Layer w0.254: v1(30.13,1.967) 36.506,1.967 36.682,1.792 46.844,1.792 47.173,1.462 52.163,1.462 52.57,1.056 57.56,1.056 57.966,1.462 58.726,1.462 59.125,1.861 v1(59.149,1.861) ; v1(60.966,15.416) 61.603,16.052 61.603,16.618 62.239,17.254 cw(c62.454,15.971) 62.454,17.272 63.334,17.272 ccw(c63.334,18.139) 63.947,17.526 64.372,17.951 64.372,22.562 64.074,22.86 R601.1@63.185,22.86
  Bottom Layer w0.254: BAT.1@24.523,7.874 24.523,7.574 v1(30.13,1.967) ; v1(59.149,1.861) 59.149,6.819 58.158,7.81 58.158,10.521 59.299,11.662 59.299,14.097 60.111,14.909 60.46,14.909 v1(60.966,15.416)
NetC13_1: C13.1 U5.2 | length 5.3
  Bottom Layer w0.254: U5.2@39.634,9.28 39.634,8.206 40.07,7.77 41.953,7.77 C13.1@43.157,6.566
NetC14_1: C14.1 U5.3 | length 3.7
  Bottom Layer w0.254: U5.3@39.134,9.28 39.134,8.131 40.614,6.651 40.978,6.651 C14.1@41.064,6.566
NetC15_1: C15.1 U5.4 | length 2.9
  Bottom Layer w0.254: U5.4@38.634,9.28 38.634,7.023 38.97,6.687 C15.1@38.97,6.566
NetC201_2: C201.2 U2.7 | length 2.6
  Bottom Layer w0.254: C201.2@17.803,28.365 19.296,28.365 19.76,28.829 U2.7@20.259,28.829
NetC301_2: C301.2 U3.2 U3.3 | length 4
  Bottom Layer w0.254: C301.2@3.131,22.975 3.246,22.86 U3.2@5.781,22.86 U3.3@5.781,24.13
NetC302_1: C302.1 R301.2 | length 1.7
  Bottom Layer w0.254: R301.2@3.131,26.22 C302.1@3.131,27.965
NetC401_1: C401.1 U4.8 | length 2.1
  Bottom Layer w0.254: U4.8@55.819,14.255 57.403,14.255 57.765,14.617 C401.1@57.78,14.617
NetC601_1: C601.1 U6.1 Y2.1 | length 10.7
  Bottom Layer w0.254: Y2.1@60.264,16.637 61.197,16.637 ccw(c61.197,18.371) 61.871,16.774 ccw(c61.772,17.007) 61.95,16.826 cw(c62.757,16.017) 63.847,15.671 cw(c62.757,16.017) 63.804,15.559 cw(c63.532,15.559) 63.724,15.366 62.46,14.102 ccw(c64.256,12.306) 61.716,12.306 C601.1@61.716,12.221 62.94,12.221 63.058,12.103 U6.1@63.058,11.788
NetC602_1: C602.1 U6.2 Y2.2 | length 9.7
  Bottom Layer w0.254: Y2.2@60.264,18.186 60.89,17.561 ccw(c61.28,17.951) 61.28,17.399 61.782,17.399 ccw(c61.781,17.653) 61.91,17.434 cw(c62.757,16.017) 64.133,16.929 64.328,16.637 64.328,16.562 ccw(c64.582,16.563) 64.338,16.492 cw(c62.757,16.017) 64.27,15.357 ccw(c64.504,15.257) 64.25,15.264 64.201,13.335 64.201,12.095 ccw(c64.635,12.095) U6.2@64.328,11.788
NetD1_1: D1.1 P2.A4 P2.A9 P2.B4 P2.B9 | length 16.8
  Bottom Layer w0.254: D1.1@61.28,20.819 D1.1@61.743,20.356 ; P2.A9@65.134,20.056 62.043,20.056 D1.1@61.743,20.356 ; P2.B4@65.134,20.32 66.233,20.32 66.487,20.574 67.376,20.574 67.757,20.955 67.757,24.384 67.503,24.638 66.52,24.638 66.271,24.887 65.903,24.887 65.634,25.156 P2.A4@65.134,25.156 ; P2.B4@65.134,20.356 D1.1@61.743,20.356
NetD201_1: D201.1 R205.1 | length 2.2
  Top Layer w0.254: D201.1@31.468,-1.232 31.569,-1.131 R205.1@33.623,-1.131
NetD501_1: D501.1 R502.1 | length 14
  Top Layer w0.254: v1(53.16,28.196) 53.418,28.453 53.492,28.528 53.492,28.633 53.492,28.664 cw(c55.558,29.188) 53.947,30.583 cw(c57.252,27.719) 53.981,30.622 cw(c57.252,27.719) 53.986,30.628 54.19,30.831 cw(c54.405,30.696) 54.229,30.879 cw(c57.252,27.719) 55.846,31.86 cw(c57.252,27.719) 55.899,31.878 ; 55.899,31.878 55.941,31.92 55.948,31.926 55.954,31.933 ; 55.954,31.934 56.121,32.126 56.126,32.131 ccw(c55.947,32.312) 56.128,32.133 56.202,32.207 56.229,32.207 D501.1@56.765,32.207
  Bottom Layer w0.254: R502.1@47.055,25.459 47.328,25.732 47.328,27.039 47.477,27.188 50.462,27.188 51.471,28.196 v1(53.16,28.196)
NetP4_2: P4.2 R509.2 U5.44 | length 19.3
  Bottom Layer w0.254: U5.44@41.634,12.78 42.976,12.78 44.144,11.612 44.144,11.265 45.186,10.223 45.65,10.223 46.078,9.795 46.078,7.984 46.81,7.252 47.541,7.252 48.555,6.238 R509.2@48.555,6.223 48.555,4.362 47.253,3.06 44.123,3.06 P4.2@42.992,4.191
NetR301_1: R301.1 R302.2 U3.4 | length 13.2
  Bottom Layer w0.254: R301.1@3.131,24.72 3.146,24.72 3.826,25.4 U3.4@5.781,25.4 6.492,25.4 7.447,26.355 14.33,26.355 15.27,25.415 R302.2@15.27,25.4
NetR401_1: R401.1 U4.7 | length 16.8
  Bottom Layer w0.254: R401.1@48.555,23.322 48.555,22.526 48.939,22.141 48.952,22.141 49.84,21.253 49.84,14.863 51.858,12.845 52.534,12.845 52.625,12.936 53.107,12.936 53.786,12.257 54.4,12.257 54.549,12.406 U4.7@54.549,14.255
NetR402_1: R402.1 U4.6 | length 14.2
  Top Layer w0.254: v1(52.866,12.355) 53.44,12.929 53.94,12.929 v1(53.968,12.957)
  Bottom Layer w0.254: R402.1@48.555,21.184 48.555,20.388 48.939,20.004 48.952,20.004 49.434,19.522 49.434,14.694 51.773,12.355 v1(52.866,12.355) ; U4.6@53.279,14.255 53.279,13.686 53.968,12.997 v1(53.968,12.957)
NetR508_1: R508.1 U5.20 | length 13.6
  Bottom Layer w0.254: R508.1@26.253,17.416 26.253,17.431 27.1,18.278 27.1,19.631 27.673,20.205 28.279,20.205 29.318,19.165 29.318,16.975 29.987,16.306 29.987,14.635 30.342,14.28 U5.20@33.134,14.28
OSC_IN: C501.1 U5.5 Y1.2 | length 19.7
  Top Layer w0.254: Y1.2@46.421,0.508 47.316,-0.387 ccw(c49.112,1.409) 49.112,-1.131 C501.1@51.501,-1.131
  Bottom Layer w0.254: U5.5@38.134,9.28 38.156,7.077 38.156,6.015 ccw(c40.696,6.015) 38.9,4.219 40.198,2.921 41.938,1.559 41.951,1.549 cw(c41.341,0.508) 42.256,1.295 ccw(c42.447,1.461) 42.272,1.278 ccw(c44.202,3.312) 44.204,0.508 Y1.2@46.421,0.508
OSC_OUT: C502.1 U5.6 Y1.1 | length 16.4
  Top Layer w0.254: C502.1@35.753,-1.131 38.65,-1.131 ccw(c38.65,1.409) 40.446,-0.387 Y1.1@41.341,0.508
  Bottom Layer w0.254: U5.6@37.634,9.28 37.634,5.267 ccw(c40.174,5.267) 38.378,3.471 Y1.1@41.341,0.508
RESET: C503.1 R501.1 U5.7 | length 44.6
  Top Layer w0.254: v1(37.599,11.242) 40.007,8.834 46.9,8.834 48.26,10.194 48.26,17.591 v1(47.574,18.277) 47.224,18.277 44.788,20.713 44.788,23.849 45.943,25.004 v1(45.943,25.585) ; C503.1@52.568,32.258 52.568,30.99 52.677,30.882 v1(52.677,30.842)
  Bottom Layer w0.254: U5.7@37.134,9.28 37.134,10.777 v1(37.599,11.242) ; v1(45.943,25.585) 45.943,26.451 47.086,27.594 48.329,27.594 48.882,28.147 49.292,28.147 49.597,28.452 49.597,29.82 50.297,30.52 52.315,30.52 52.637,30.842 v1(52.677,30.842) ; R501.1@47.055,19.047 47.055,19.032 47.574,18.513 v1(47.574,18.277)